# Altium PCB MATRIX-x1.PcbDoc
Units mil, origin at the board's own origin, x right, y up, seen from the top; angles counter-clockwise.
Board outline 6470 x 2570 mil, 2 copper layers (Top Layer, Bottom Layer); 8 components, 23 nets, 61 pads, 0 vias.
Unrouted connection lines stored in the file: 35.
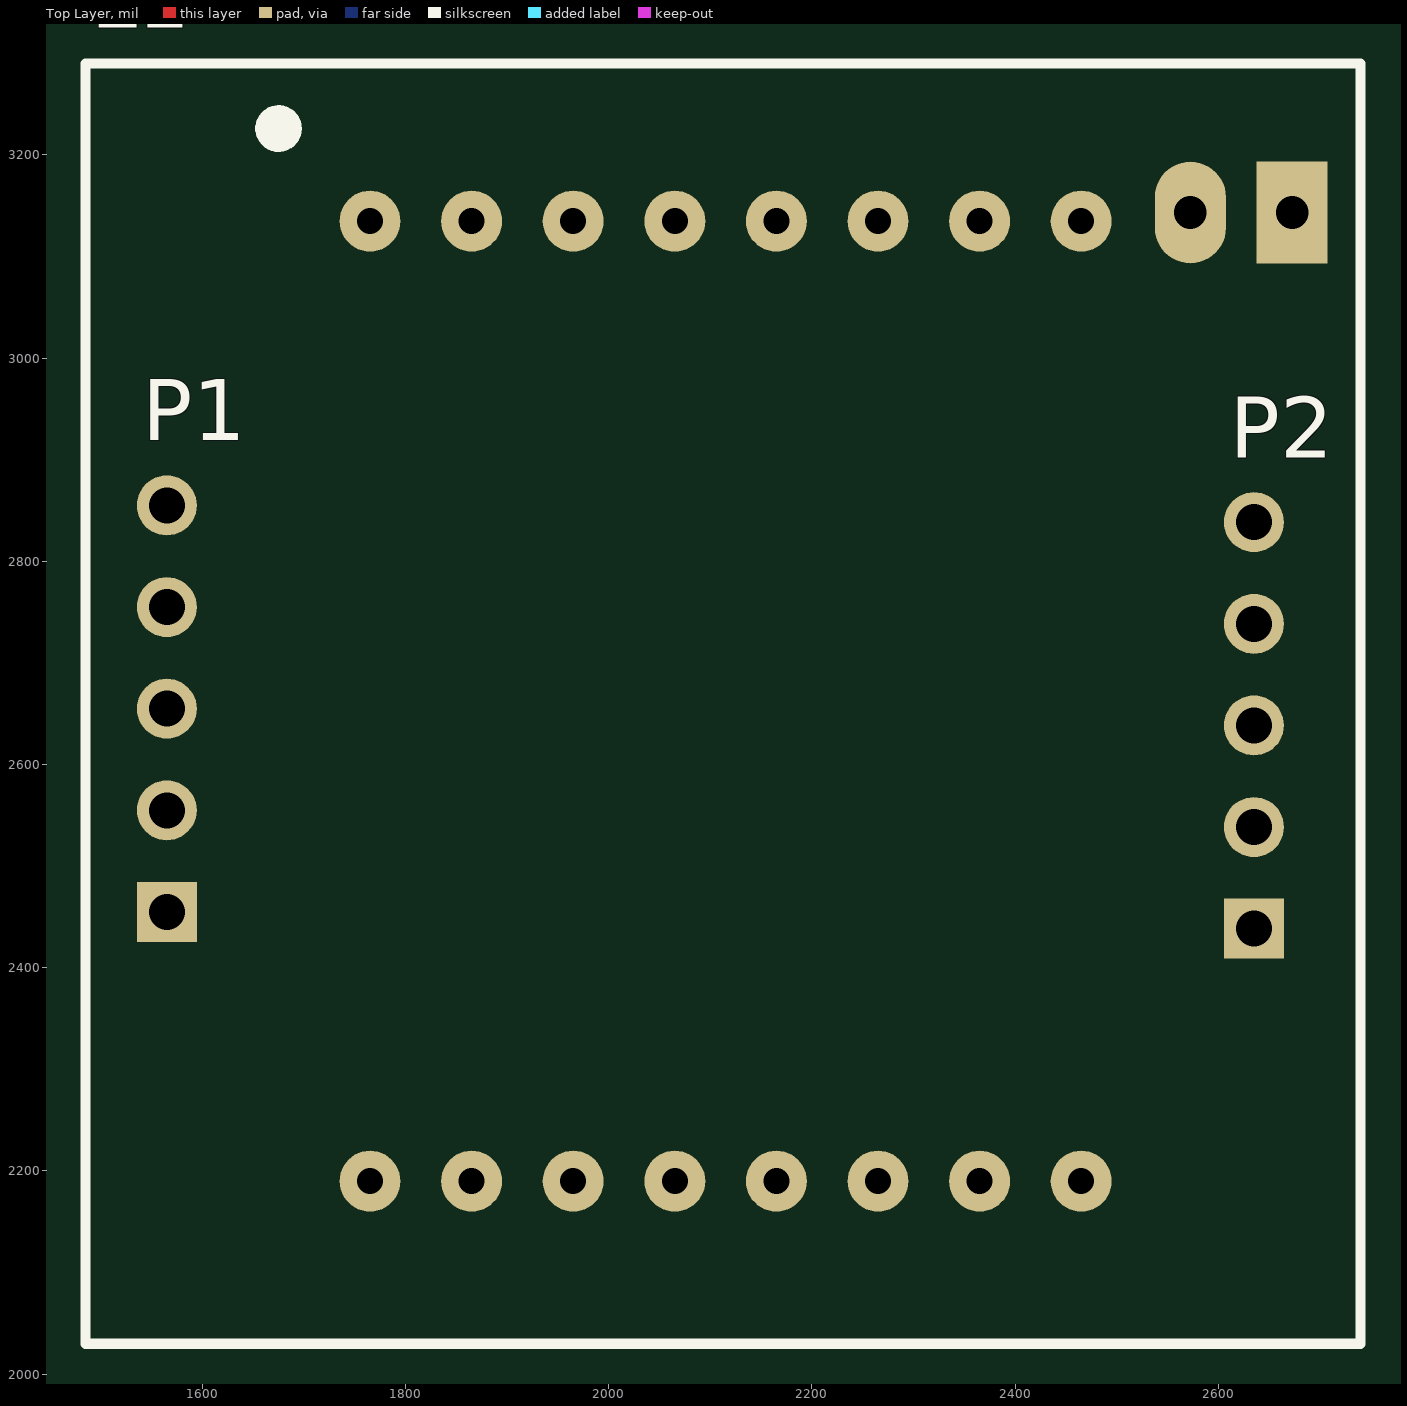
[diagram p0: Top Layer view]
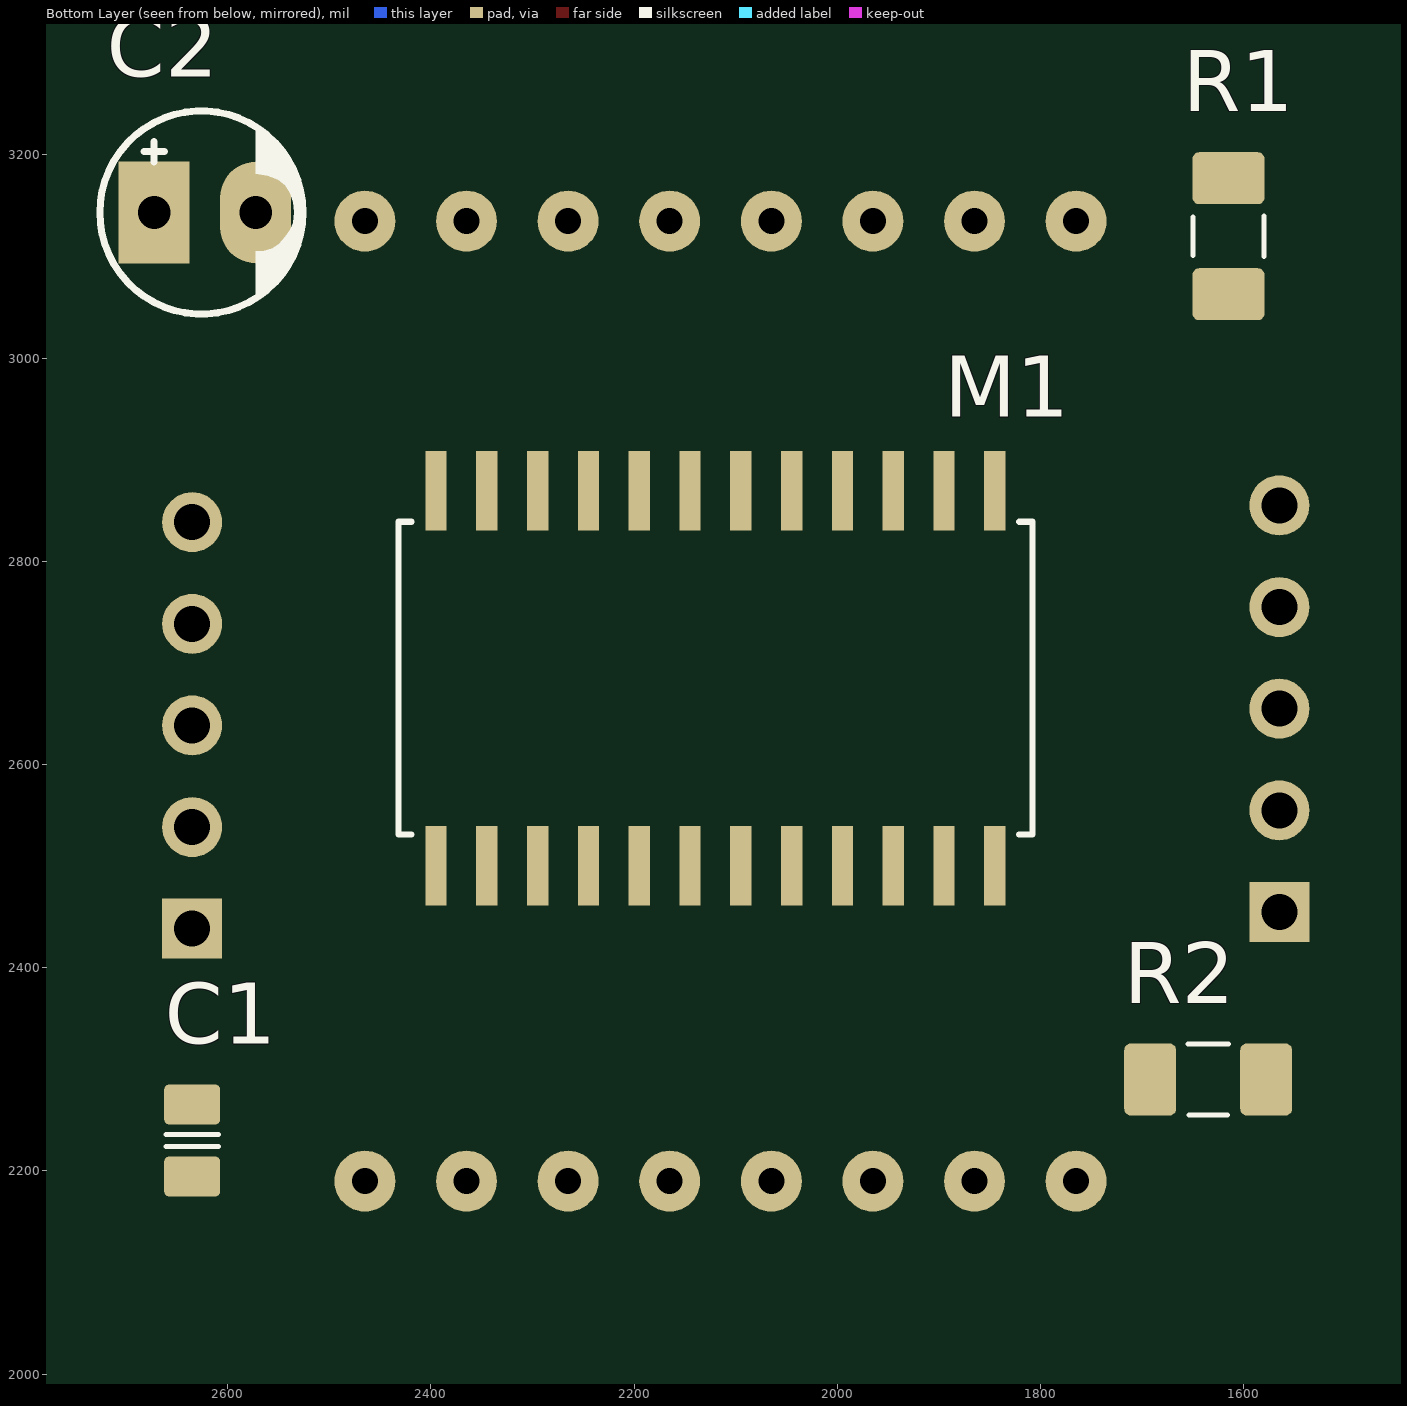
[diagram p1: Bottom Layer view, seen from below]

## Layer stack, top to bottom
Top Solder: solder mask 0.4, Solder Resist, Dk 3.5
Top Layer: signal copper 1.4
Dielectric 1: dielectric 12.6, FR-4, Dk 4.8
Bottom Layer: signal copper 1.4
Bottom Solder: solder mask 0.4, Solder Resist, Dk 3.5

## Board outline
830,1530 7300,1530 7300,4100 830,4100

## Design rules (kind name [scope] priority, off if disabled: settings)
Clearance [All] p1: gap=10 ignorepadtopadclearanceinfootprint=FALSE except(0: Arc-Hole Track-Hole SMDPad-Hole THPad-Hole Via-Hole Fill-Hole Poly-Hole Region-Hole Text-Hole)
PolygonConnect [All] p1: connectstyle=Relief reliefconductorwidth=10 reliefentries=4 polygonreliefangle="90 Angle" airgapwidth=10
RoomDefinition MATRIX-x1 [InComponentClass('MATRIX-x1')] p1: confinementstyle=ConfineIn formatcopy=TRUE lockcomponents=FALSE outline 7295,2385 10740,2385 10740,3765 7295,3765
RoutingVias [All] p1: holewidth=28 width=50 viastyle="Through Hole" minholewidth=28 minwidth=50 maxholewidth=28 maxwidth=50
SolderMaskExpansion [All] p1: expansion=4 istentingtop=FALSE
Width [All] p1: maxlimit=10 minlimit=10 preferedwidth=10
30 further rules are at their usual default settings.

## Components (designator, comment, footprint, x,y, rotation, side; value= is the part's Value field where it differs from the comment)
C1 "approved sub OK" CAPC2012X135N 2635,2230 r270 bottom value=0.1uF
C2 "10uF" CP1/2 2672.52,3143.37 r180 bottom
L1 "LEDMATRIX-8X8" LEDMATRIX_8X8 2095,2670 r0 top
M1 "MAX7219" MAX7219 2120,2690 r90 bottom
P1 "Header 5H" HDR1X5H 1565,2455 r90 top
P2 "Header 5H" HDR1X5H 2635,2438.52 r90 top
R1 "Thick Film" RESC3216N_ZERO 1615,3120 r90 bottom value=27K
R2 "Thick Film" RESC3216N_ZERO 1635,2290 r0 bottom value=10K

## Footprints (in the part's own frame and the unit in brackets; to place one, negate y for a bottom-side part, rotate by r counter-clockwise, add the part's x,y. Pads: shape width x height; smd on the part's side, far side on the other; paste and mask are expansions set on the pad)
CAPC2012X135N [mm] "Chip Capacitor, Body 2.0x1.2mm, EIA 0805, IPC Medium Density"
  round 0.254 on Mech15: 0(0,0)
  rrect25% 1x1.4 smd: 1(-0.9,0) 2(0.9,0)
  Top Layer pour cut-out: -0.675,0.7 -0.475,0.9 0.475,0.9 0.675,0.7 0.675,-0.7 0.475,-0.9 -0.475,-0.9 -0.675,-0.7
  silkscreen extent -0.15,-0.65 0.15,0.65, body extent -1.1,-0.72 1.1,0.73, height 1.34
CP1/2 [mil]
  rect 70x100 hole 32: 1(0,0)
  oval 70x100 hole 32: 2(100,0)
  silkscreen extent -53,-100 147,100, body extent -54,-99 144,100, height 296
HDR1X5H [mm] "Connector; Header; 5 Position; Right Angle"
  rect 1.5x1.5 hole 0.9: 1(0,0)
  round 1.5 hole 0.9: 2(2.54,0) 3(5.08,0) 4(7.62,0) 5(10.16,0)
LEDMATRIX_8X8 [mil] "3mm"
  round 60 hole 25.59: C1(-30,464.88) C2(-130,-480) C3(-30,-480) C4(270,464.88) C5(170,-480) C6(170,464.88) C7(-230,464.88) C8(-330,464.88) R1(370,464.88) R2(-130,464.88) R3(370,-480) R4(70,464.88) R5(-330,-480) R6(270,-480) R7(-230,-480) R8(70,-480)
  silkscreen extent -610,-640 645,620, body extent -610,-639 650,621, height 239
MAX7219 [mil]
  rect 78x21 smd: 1(-189.5,275) 2(-189.5,225) 3(-189.5,175) 4(-189.5,125) 5(-189.5,75) 6(-189.5,25) 7(-189.5,-25) 8(-189.5,-75) 9(-189.5,-125) 10(-189.5,-175) 11(-189.5,-225) 12(-189.5,-275) 13(179.5,-275) 14(179.5,-225) 15(179.5,-175) 16(179.5,-125) 17(179.5,-75) 18(179.5,-25) 19(179.5,25) 20(179.5,75) 21(179.5,125) 22(179.5,175) 23(179.5,225) 24(179.5,275)
  silkscreen extent -159,-312 149,312, body extent -208,-303 198,303, height 104
RESC3216N_ZERO [mm] "Chip Resistor, Body 3.2x1.6mm, 1206, IPC Medium Density"
  round 0.508 on Mech15: 0(0,0)
  rrect25% 1.3x1.8 smd: 1(-1.45,0) 2(1.45,0)
  silkscreen extent -0.51,-0.89 0.51,0.89, body extent -1.62,-0.82 1.63,0.83, height 0.69

## Part data
C1: library part "CAP C_0805", "Capacitor SMD Cer 1.8nF 10% 50V X7R 0805", Manufacturer 1="AVX Corporation", Manufacturer Part Number 1=08055C182KAT2A, Operating Temperature="-55°C ~ 125°C", Package / Case="0805 (2012 metric)", Ratings="50V; X7R", Supplier Part Number 1=478-1374-1-ND, Tolerance=±10%, SCDType=source*, Supplier 1=Digi-Key
C2: library part "CAP hoa", "Cap"
P1 P2: "Header, 5-Pin, Right Angle", LatestRevisionDate=17-Jul-2002, LatestRevisionNote="Re-released for DXP Platform.", Publisher="Altium Limited"
R1 R2: library part RES_1206, "Resistor SMD chip 0.0 Ohm 0.25W 1206", Manufacturer 1=Vishay/Dale, Manufacturer Part Number 1=CRCW12060000Z0EA, Package / Case="1206 (3216 metric)", Ratings=1/4W, Supplier Part Number 1=541-0.0ECT-ND, Tolerance=±5%, SCDType=spec*\?, Supplier 1=Digi-Key

## Nets (pads, with @x,y where several pads share a name; then routed paths per layer and width w, separated by ;. In a path a pad name is that pad's centre, name@x,y a point inside that pad or via, vN(x,y) a via of type N, cw(c..) or ccw(c..) an arc to the next point about the centre after c; other vN are vias at no path point)
5V: C1.1 C2.1 M1.19 P1.1 P2.1 R1.2 R2.2
A1: L1.R2 M1.14
B1: L1.R3 M1.16
C1: L1.R4 M1.20
CLK: M1.13 P1.5 P2.5
D1: L1.R5 M1.23
DIG01: L1.C1 M1.2
DIG11: L1.C2 M1.11
DIG21: L1.C3 M1.6
DIG31: L1.C4 M1.7
DIG41: L1.C5 M1.3
DIG51: L1.C6 M1.10
DIG61: L1.C7 M1.5
DIG71: L1.C8 M1.8
DIN: M1.1 P1.3
DOUT: M1.24 P2.3
DP1: L1.R1 M1.22
E1: L1.R6 M1.21
F1: L1.R7 M1.15
G1: L1.R8 M1.17
GND: C1.2 C2.2 M1.4 M1.9 P1.2 P2.2
LOAD: M1.12 P1.4 P2.4 R2.1
NetM1_18: M1.18 R1.1
pads on no net: C1.0 R1.0 R2.0